# Altium PCB WIZ850io_SCH_V100.PcbDoc
Units mil, origin at the board's own origin, x right, y up, seen from the top; angles counter-clockwise.
Board outline 905.51 x 984.25 mil, 4 copper layers (Top Layer, Internal Plane 1, Internal Plane 2, Bottom Layer); 39 components, 33 nets, 146 pads, 68 vias.
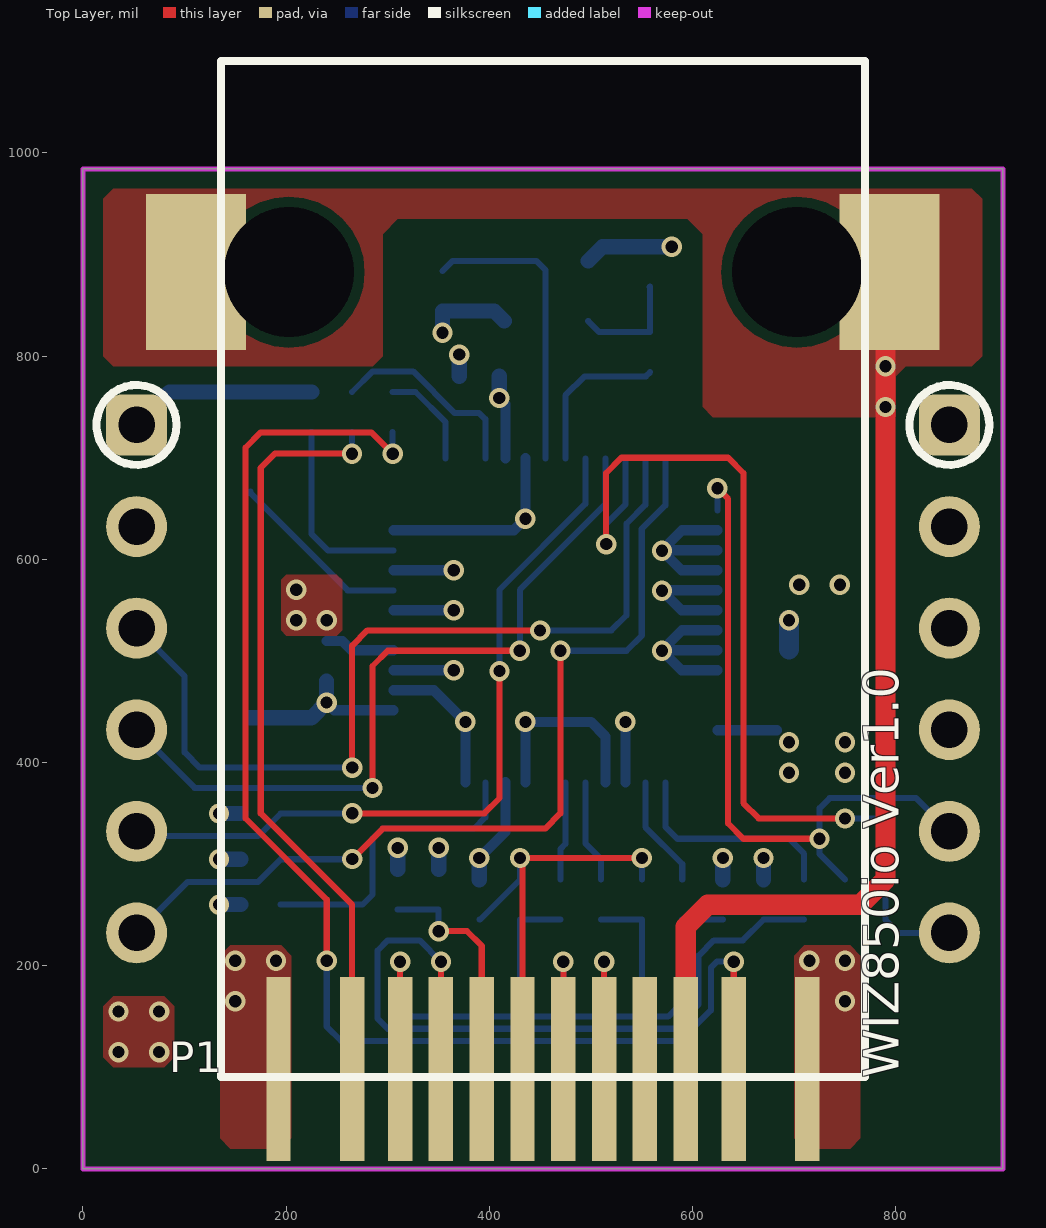
[diagram p0: Top Layer view]
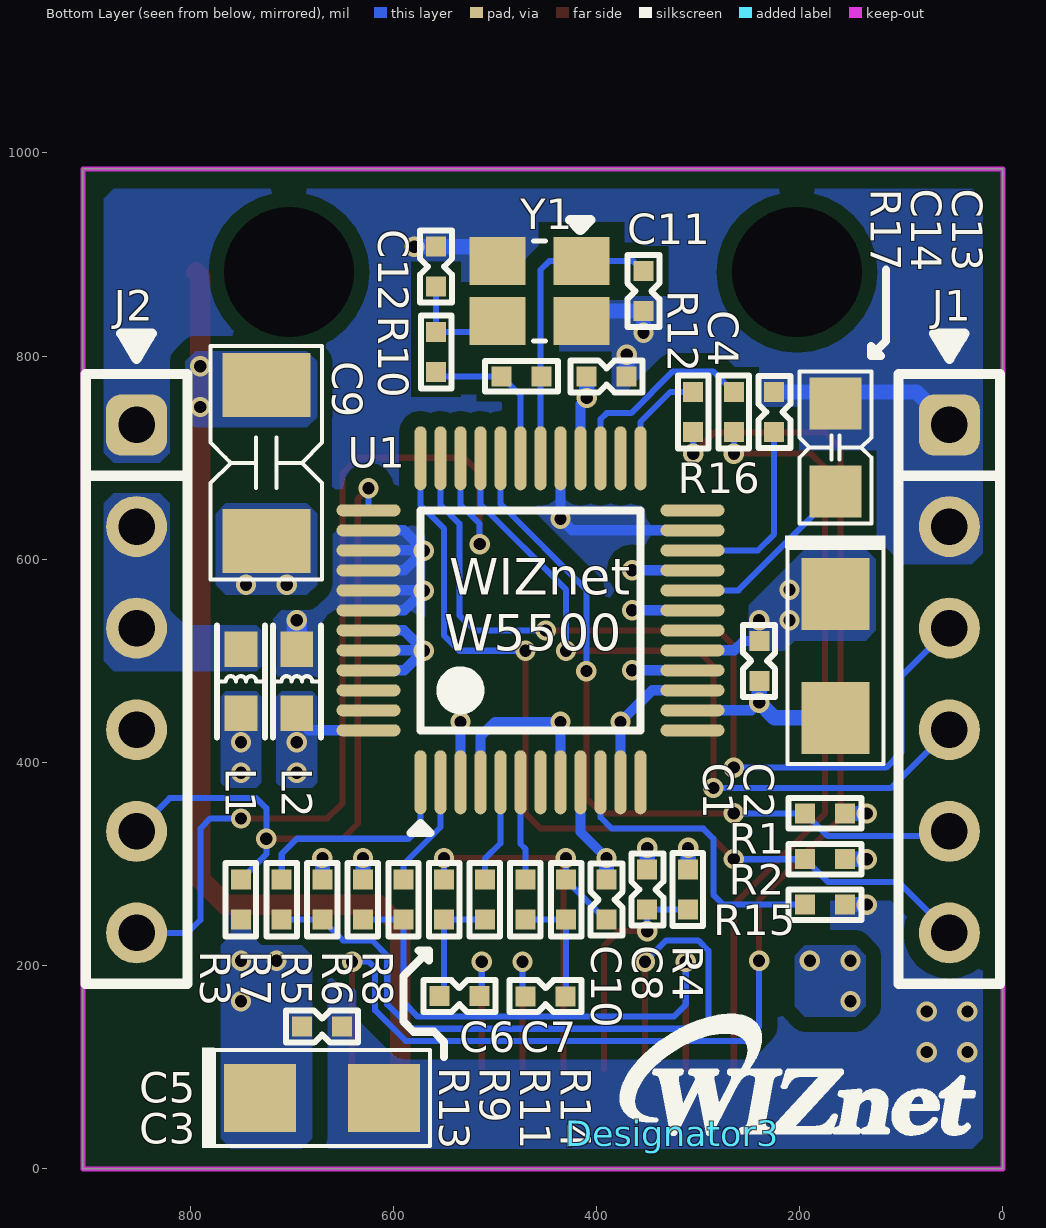
[diagram p1: Bottom Layer view, seen from below]
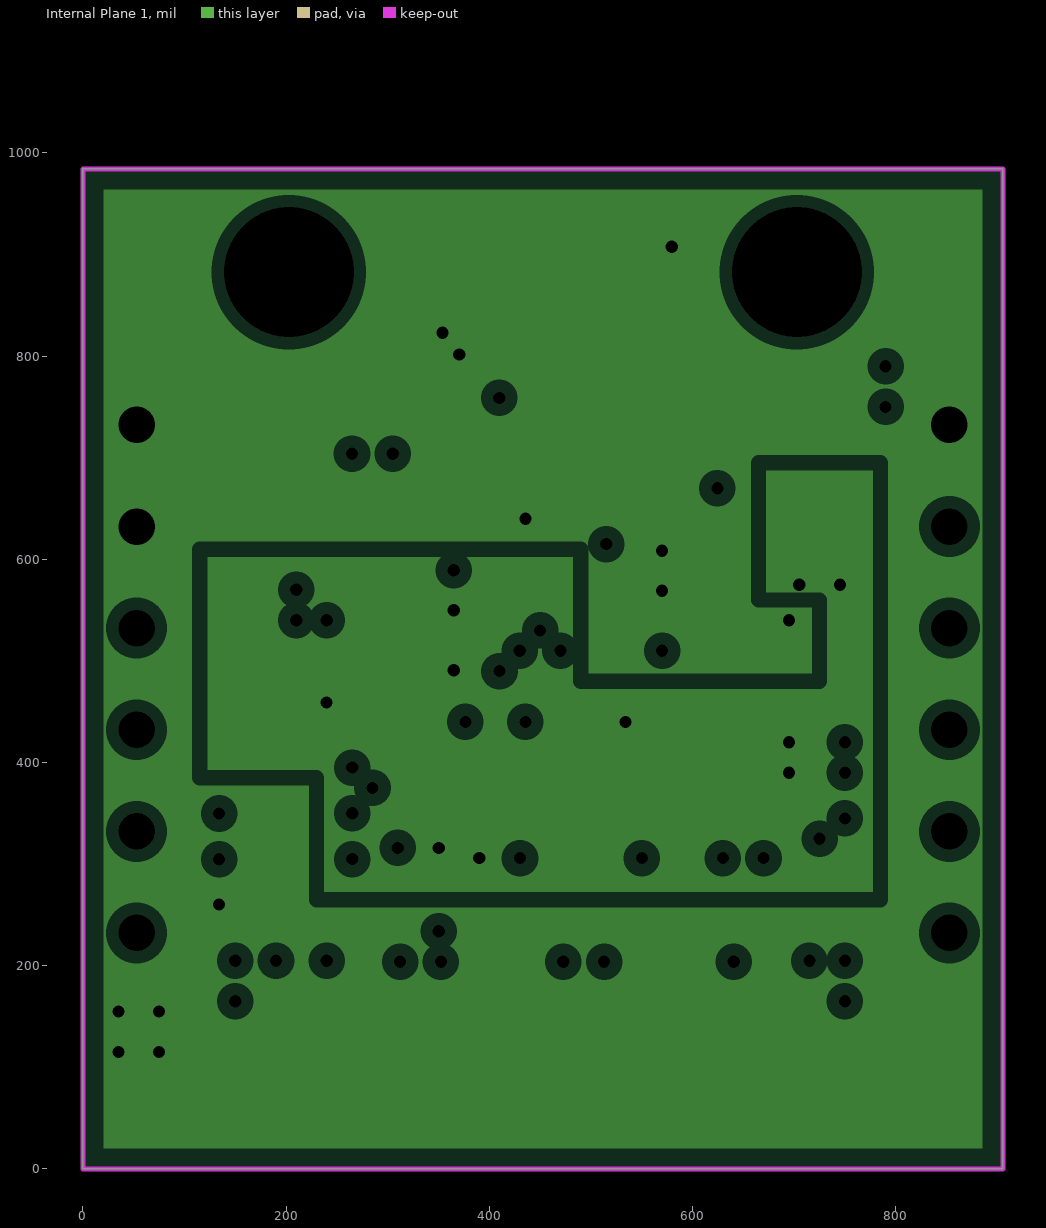
[diagram p2: Internal Plane 1, clearances drawn from the general rule]
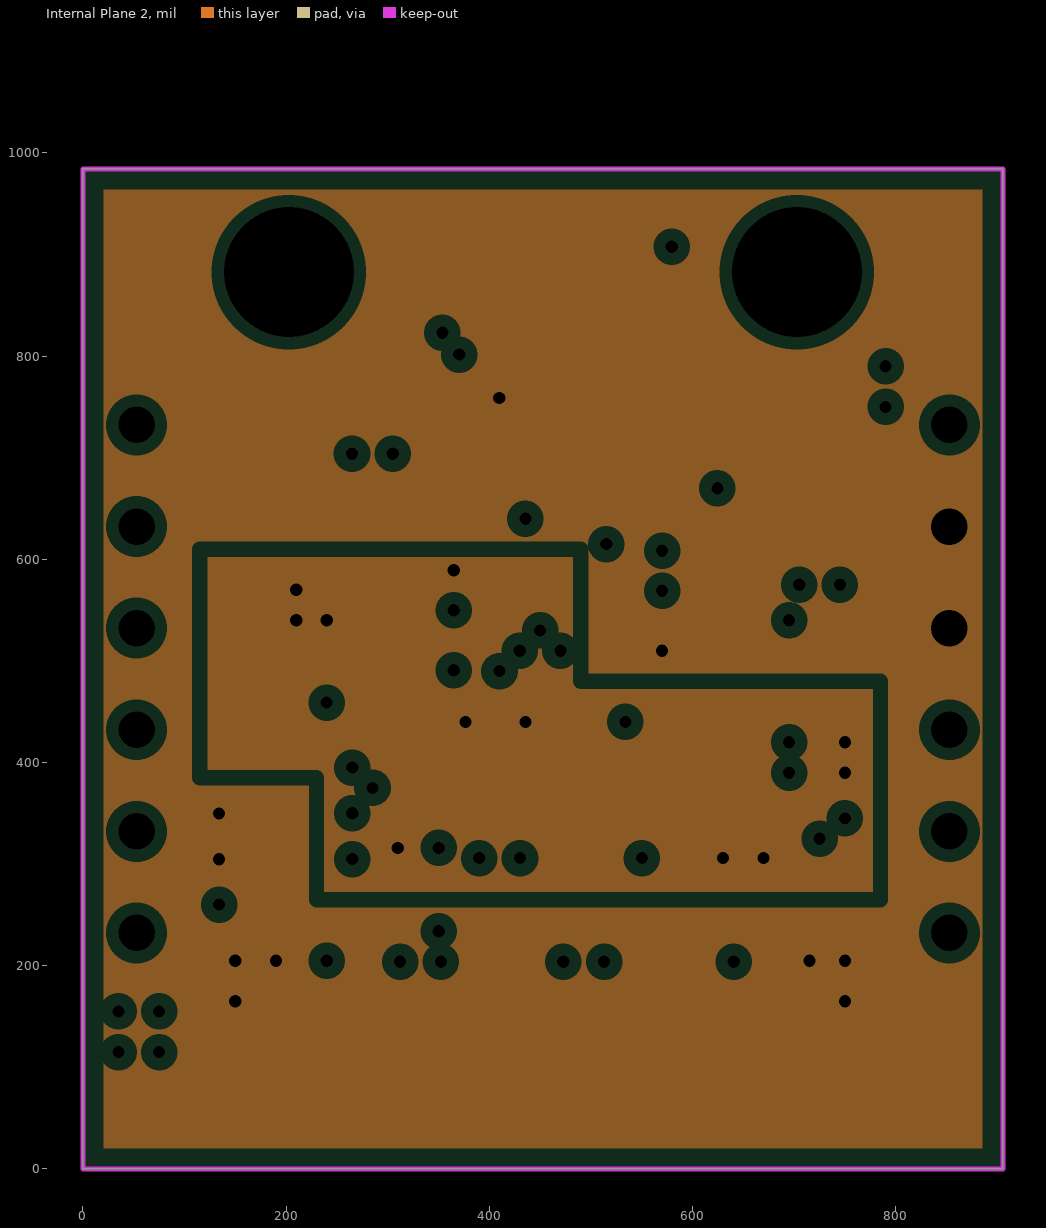
[diagram p3: Internal Plane 2, clearances drawn from the general rule]
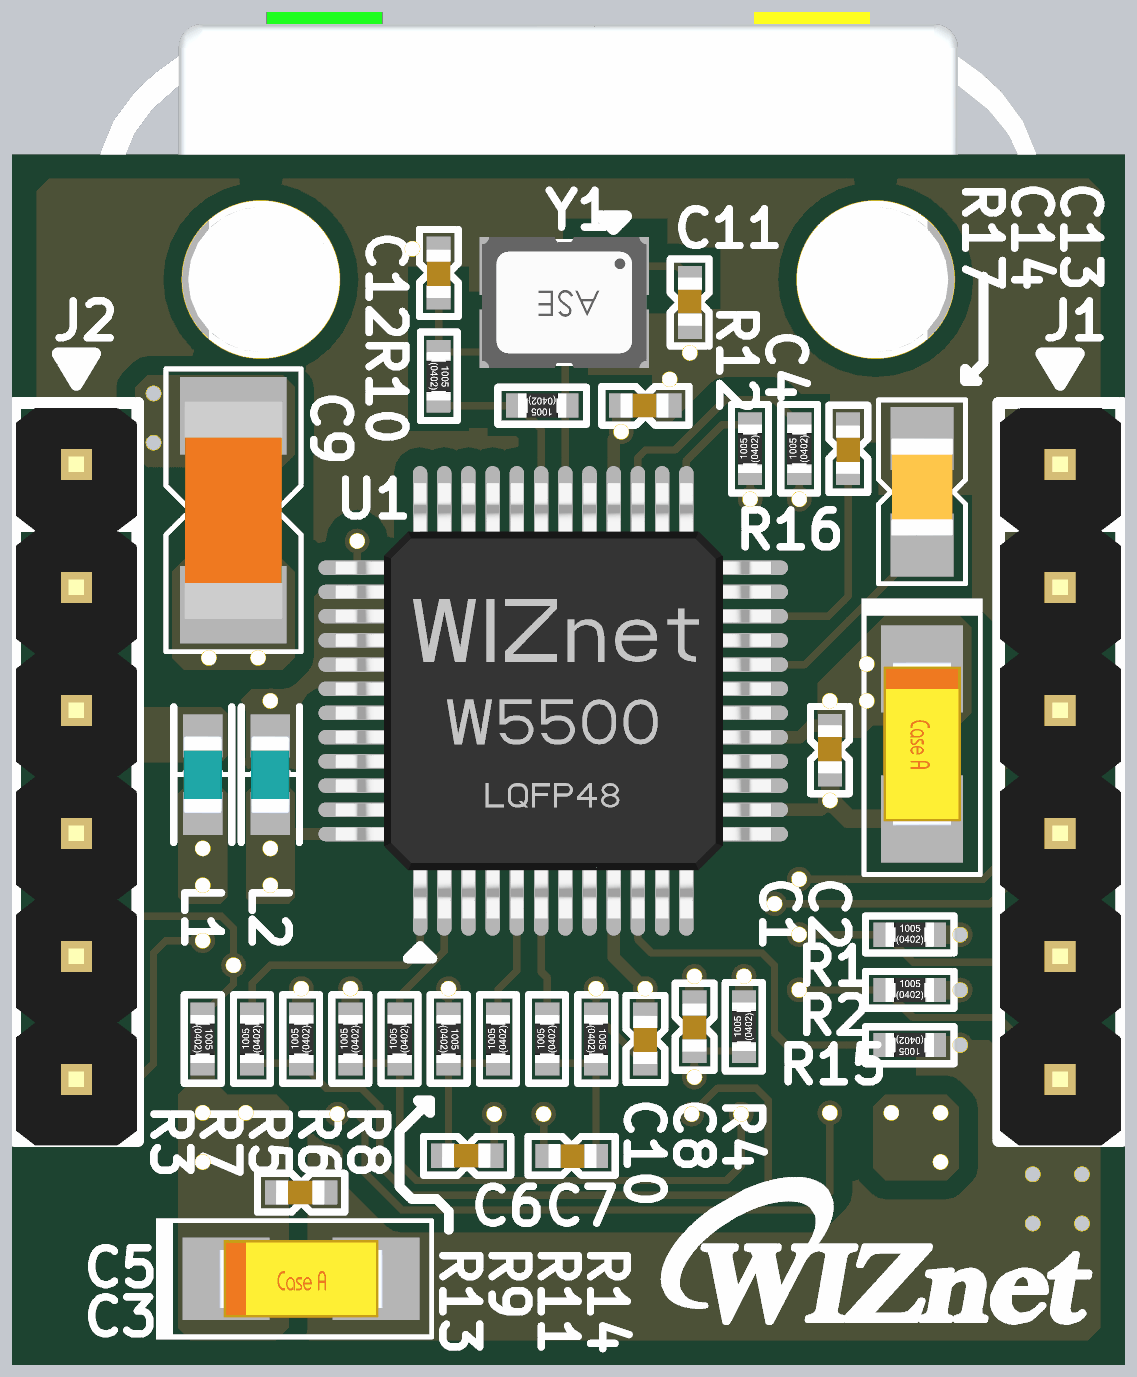
[diagram p4: 3D render of the assembled board from below, using the file's embedded part models]

## Layer stack, top to bottom
Top Solder: solder mask 0.4, Solder Resist, Dk 3.5
Top Layer: signal copper 1.4
Dielectric1: dielectric 12.6, FR-4, Dk 4.8
Internal Plane 1: plane copper 1.4, net GND
Dielectric2: dielectric 12.6, FR-4, Dk 4.8
Internal Plane 2: plane copper 1.4, net 3.3V_D
Dielectric3: dielectric 12.6, FR-4, Dk 4.8
Bottom Layer: signal copper 1.4
Bottom Solder: solder mask 0.4, Solder Resist, Dk 3.5

## Board outline
0,0 905.51,0 905.51,984.25 0,984.25

## Design rules (kind name [scope] priority, off if disabled: settings)
Clearance [All] p1: gap=6
PlaneClearance [All] p1: clearance=12
PlaneConnect [All] p1: planeconnectstyle=Direct reliefexpansion=20 reliefentries=4 reliefconductorwidth=10 reliefairgap=10
PolygonConnect [All] p1: connectstyle=Direct reliefconductorwidth=10 reliefentries=4 polygonreliefangle="90 Angle" airgapwidth=10
RoutingVias [All] p1: holewidth=12 width=20 viastyle="Through Hole" minholewidth=12 minwidth=20 maxholewidth=28 maxwidth=50
SolderMaskExpansion [All] p1: expansion=0
UnpouredPolygon [All] p1: allowunpoured=FALSE
Width [All] p1: maxlimit=100 minlimit=4 preferedwidth=10
27 further rules are at their usual default settings.

## Components (designator, comment, footprint, x,y, rotation, side; value= is the part's Value field where it differs from the comment)
C1 "0.1uF" CAP-0402 240,500 r90 bottom
C2 "10uF/16V" "CAP-A SIZE" 165,505 r270 bottom
C3 "10uF/16V" "CAP-A SIZE" 670,70 r180 bottom
C4 "0.1uF" CAP-0402 390,780 r0 bottom
C5 "0.1uF" CAP-0402 670,140 r0 bottom
C6 "6.8nF" CAP-0402 535,170 r0 bottom
C7 "6.8nF" CAP-0402 450,170 r180 bottom
C8 "22nF" CAP-0402 350,275 r270 bottom
C9 "1nF/2kV" CAP-1808 725,695 r90 bottom
C10 "10nF" CAP-0402 390,265 r270 bottom
C11 "18pF" CAP-0402 354,864 r90 bottom
C12 "18pF" CAP-0402 558,888 r270 bottom
C13 "4.7uF" CAP-0805 165,710 r270 bottom
C14 "10nF" CAP-0402 225,745 r270 bottom
Designator3 "Comment" LOGO-WIZNET(SMALL) 325,35 r180 bottom
J1 "2.54mm 1x6 Pin Header DIP" IDC-1X6 52.76,732.28 r270 bottom locked
J2 "2.54mm 1x6 Pin Header DIP" IDC-1X6 852.76,732.28 r270 bottom locked
L1 "HH-1M1608-121JT" IND-0603 750,480 r90 bottom
L2 "HH-1M1608-121JT" IND-0603 695,480 r90 bottom
P1 "BS-R250210" BS-R250210 452.76,590.55 r180 top locked
R1 "4.7K" RES-0402 175,350 r180 bottom
R2 "4.7K" RES-0402 175,305 r180 bottom
R3 "4.7K" RES-0402 750,265 r270 bottom
R4 "10R" RES-0402 310,275 r90 bottom
R5 "49R9" RES-0402 670,265 r90 bottom
R6 "49R9" RES-0402 630,265 r90 bottom
R7 "33R" RES-0402 710,265 r90 bottom
R8 "33R" RES-0402 590,265 r90 bottom
R9 "33R" RES-0402 510,265 r90 bottom
R10 "0R" RES-0402 558,804 r270 bottom
R11 "33R" RES-0402 470,265 r90 bottom
R12 "1M" RES-0402 474,780 r0 bottom
R13 "49R9" RES-0402 550,265 r270 bottom
R14 "49R9" RES-0402 430,265 r270 bottom
R15 "12.4K" RES-0402 175,260 r0 bottom
R16 "330R" RES-0402 305,745 r90 bottom
R17 "330R" RES-0402 265,745 r90 bottom
U1 "W5500" "WIZNET W5500" 465,540 r180 bottom locked
Y1 "25MHz" OSC-82J0626 456,864 r0 bottom

## Footprints (in the part's own frame and the unit in brackets; to place one, negate y for a bottom-side part, rotate by r counter-clockwise, add the part's x,y. Pads: shape width x height; smd on the part's side, far side on the other; paste and mask are expansions set on the pad)
BS-R250210 [mm] "BS-R250210"
  rect 0.61x4.6 smd: L1(6.61,12.5) L2(4.77,12.5) L3(-4.77,12.5) L4(-6.61,12.5) R1(3.57,12.5) R2(2.55,12.5) R3(1.53,12.5) R4(0.51,12.5) R5(-0.51,12.5) R6(-1.53,12.5) R7(-2.55,12.5) R8(-3.57,12.5)
  rect 2.5x3.9 smd: S1(-8.67,-7.42) S2(8.67,-7.42)
  round 0 hole 3.25: ""(-6.35,-7.42) ""(6.35,-7.42)
  silkscreen extent -8.05,-12.7 8.05,12.7, body extent -9.75,-12.95 9.75,14.1, height 14.58
CAP-0402 [mm] "Ceramic CAP 0402(1005)"
  rect 0.5x0.5 smd: 1(-0.5,-0.004) 2(0.5,-0.004)
  silkscreen extent -0.9,-0.4 0.9,0.4, body extent -0.48,-0.25 0.52,0.25, height 0.6
CAP-0805 [mm] "Ceramic CAP 0805(2012)"
  rect 1.3x1.3 smd: 1(-1.1,0) 2(1.1,0)
  silkscreen extent -1.9,-0.9 1.9,0.9, body extent -1.19,-0.64 0.99,0.64, height 1.26
CAP-1808 [mm] "Ceramic CAP 1808(4520)"
  rect 1.6x2.2 smd: 1(-1.95,0) 2(1.95,0)
  silkscreen extent -2.92,-1.4 2.92,1.4, body extent -2.25,-1.02 2.25,1.01, height 2
"CAP-A SIZE" [mm] "Tantal CAP A Size EIA/IECQ 3216"
  rect 1.8x1.7 smd: 1(-1.55,0) 2(1.55,0)
  silkscreen extent -3,-1.25 2.7,1.25, body extent -1.7,-0.8 1.7,0.8, height 1.75
IDC-1X6 [mil]
  rrect50% 60x60 hole 36: 1(0,0)
  round 60 hole 36: 2(100,0) 3(200,0) 4(300,0) 5(400,0) 6(500,0)
  silkscreen extent -90,-50 550,50, body extent -46,-49 554,49, height 323
IND-0603 [mm] "Inductor 0603(1608)"
  rect 0.89x0.82 smd: 1(-0.8,0) 2(0.8,0)
  silkscreen extent -1.4,-0.6 1.4,0.6, body extent -0.8,-0.4 0.8,0.4, height 0.95
LOGO-WIZNET(SMALL) [mil]
  silkscreen extent -50,0 296,115
OSC-82J0626 [mm]
  rect 1.4x1.2 smd: 1(-1.05,-0.75) 2(1.05,-0.75) 3(1.05,0.75) 4(-1.05,0.75)
  silkscreen extent -1.27,-1.78 0.15,1.25, body extent -1.7,-1.35 1.7,1.35, height 1.06
RES-0402 [mm]
  rect 0.5x0.5 smd: 1(-0.5,-0.004) 2(0.5,-0.004)
  silkscreen extent -0.91,-0.38 0.91,0.38, body extent -0.5,-0.25 0.5,0.25, height 0.35
"WIZNET W5500" [mm]
  oval 0.3x1.6 smd: 1(-2.75,-4.05) 2(-2.25,-4.05) 3(-1.75,-4.05) 4(-1.25,-4.05) 5(-0.75,-4.05) 6(-0.25,-4.05) 7(0.25,-4.05) 8(0.75,-4.05) 9(1.25,-4.05) 10(1.75,-4.05) 11(2.25,-4.05) 12(2.75,-4.05) 25(2.75,4.05) 26(2.25,4.05) 27(1.75,4.05) 28(1.25,4.05) 29(0.75,4.05) 30(0.25,4.05) 31(-0.25,4.05) 32(-0.75,4.05) 33(-1.25,4.05) 34(-1.75,4.05) 35(-2.25,4.05) 36(-2.75,4.05)
  oval 1.6x0.3 smd: 13(4.05,-2.75) 14(4.05,-2.25) 15(4.05,-1.75) 16(4.05,-1.25) 17(4.05,-0.75) 18(4.05,-0.25) 19(4.05,0.25) 20(4.05,0.75) 21(4.05,1.25) 22(4.05,1.75) 23(4.05,2.25) 24(4.05,2.75) 37(-4.05,2.75) 38(-4.05,2.25) 39(-4.05,1.75) 40(-4.05,1.25) 41(-4.05,0.75) 42(-4.05,0.25) 43(-4.05,-0.25) 44(-4.05,-0.75) 45(-4.05,-1.25) 46(-4.05,-1.75) 47(-4.05,-2.25) 48(-4.05,-2.75)
  silkscreen extent -3,-5.32 2.75,2.75, body extent -4.5,-4.5 4.5,4.5, height 1.65

## Part data
C1 C4 C5 C6 C7 C8 C10 C11 C12 C13: library part CAP-0402, "Ceramic CAP 0402(1005)"
C2 C3: library part "CAP-A Size", "Tantla CAP A Size EIA/IECQ 3216"
C9: library part CAP-1808, "Ceramic CAP 1808(4520)"
C14: library part CAP-0805, "Ceramic CAP 0805(2012)"
L1 L2: library part IND-0603, "Inductor 0603(1608)"
R1 R2 R3 R4 R5 R6 R7 R8 R9 R10 R11 R12 R13 R14 R15 R16 R17: library part RES-0402, "RES-0402"
U1: "WIZnet W5500"
Y1: library part OSC-82J0626-25MHz, "X-tal 25MHz,3.2x2.5 SMD, CL=18pF"

## Via types
v1: diameter 20, hole 12, Top Layer to Bottom Layer, tented both sides, 68 vias

## Nets (pads, with @x,y where several pads share a name; then routed paths per layer and width w, separated by ;. In a path a pad name is that pad's centre, name@x,y a point inside that pad or via, vN(x,y) a via of type N, cw(c..) or ccw(c..) an arc to the next point about the centre after c; other vN are vias at no path point)
3.3V_A: C1.2 C2.1 L1.1 R4.2 R5.2 R6.2 U1.4 U1.8 U1.11 U1.15 U1.17 U1.21 | length 525.4
  Bottom Layer w10: C1.2 255.32,519.68 264.53,510.47 U1.17 ; U1.15 345.31,471.1 v1(376.42,440) U1.11 ; U1.21 v1(365,589.21) ; U1.8 v1(435.47,440) 500,440 514.21,425.79 U1.4
  Bottom Layer w15: R4.2 v1(309.84,316) ; R6.2 v1(629.84,306) ; R5.2 v1(669.84,306)
  other v1: 750,390 750,420 210,540 240,540 210,570
3.3V_D: C3.1 C4.2 C5.2 J2.2 J2.3 L1.2 P1.L1 P1.L4 R1.2 R2.2 R3.2 U1.28 U1.43 U1.44 U1.45 | length 305.3
  Bottom Layer w10: v1(409.68,758.84) 415.79,752.74 U1.28 ; v1(570,510) 589.21,490.79 U1.45 ; U1.44 570,510.47 589.68,530.16 U1.43
  Bottom Layer w15: v1(134,304.84) R2.2 ; v1(134,349.84) R1.2 ; v1(409.68,758.84) C4.2
  other v1: 150,165 750,165 150,205 190,205 715,205 750,205
ACT_LED: R17.2 U1.27 | length 197.6
  Bottom Layer w6: R17.2 285.16,785 325,785 366,744 390,744 396.1,737.9 U1.27
AGND: C1.1 C2.2 C8.1 C9.1 C10.1 L2.1 U1.3 U1.9 U1.14 U1.16 U1.19 U1.48 | length 536.2
  Bottom Layer w10: v1(239.84,459) 247.43,451.42 U1.14 ; U1.16 v1(365,490.79) ; U1.19 v1(365,549.84) ; v1(390.16,306) 415.79,331.63 U1.9 ; U1.3 v1(533.9,440) ; U1.48 L2.1@683.27,431.73
  Bottom Layer w15: C2.2 224.82,443.98 v1(239.84,459) C1.1 ; C8.1 v1(350.16,316) ; C10.1 v1(390.16,306)
  other v1: 695,390 695,420 705,575 745,575
GND: C3.2 C4.1 C5.1 C11.1 C12.1 C13.1 C14.1 J1.1 J1.2 J2.1 L2.2 R15.1 U1.23 U1.29 U1.38 U1.39 U1.40 U1.41 U1.42 Y1.2 Y1.4 | length 923
  Bottom Layer w10: U1.23 424.06,628.58 v1(435.47,640) U1.29 ; v1(570,569.06) 589.21,549.84 U1.42 ; v1@570,569.53 U1.41 ; v1(570,608.43) 589.21,589.21 U1.40 ; U1.39 570,608.9 589.68,628.58 U1.38 ; L2.2@693.98,510.47 L2.2
  Bottom Layer w15: J1.1 85.16,764.68 C14.1 ; v1(134,260.16) R15.1 ; v1(353.84,823) C11.1 404.82,844.32 Y1.4 ; C4.1 v1(370.32,801.47) ; Y1.2 511.5,907.68 C12.1 v1(579.47,907.68)
  Bottom Layer w20: L2.2 v1(695,540)
  other v1: 35,115 75,115 35,155 75,155
INTN: J1.6 R2.1 U1.36 | length 896.3
  Top Layer w6: v1(265,305) 295,335 455,335 470,350 v1(470,510)
  Bottom Layer w6: J1.6 102.97,282.5 172.34,282.5 R2.1 264.84,304.84 v1(265,305) ; v1(470,510) 535,510 550,525 550,630 573.27,653.27 U1.36
LINK_LED: R16.2 U1.25 | length 99.9
  Bottom Layer w6: R16.2 327.32,764.68 356.73,735.27 U1.25
MISO: J2.6 U1.34 | length 943.1
  Top Layer w6: v1(515,615) 515,685 530,700 635,700 650,685 650,360 665,345 v1(750,345)
  Bottom Layer w6: v1(515,615) 515,635 533.9,653.9 U1.34 ; v1(750,345) 780,345 790,335 790,245 802.72,232.28 J2.6
MOSI: J1.3 U1.35 | length 877.6
  Top Layer w6: v1(265,395) 265,515 280,530 v1(450,530)
  Bottom Layer w6: J1.3 100,485.04 100,410 115,395 v1(265,395) ; v1(450,530) 520,530 535,545 535,635 553.58,653.58 U1.35
NetC6_1: C6.1 P1.R6 | length 140.4
  Top Layer w6: P1.R6 v1(512.99,204)
  Bottom Layer w6: v1(512.99,204) 512.99,172.48 C6.1
NetC6_2: C6.2 R9.1 R13.2 | length 117.3
  Bottom Layer w6: R9.1 R13.2 550.16,174.68 C6.2
NetC7_1: C7.1 P1.R5 | length 141
  Top Layer w6: P1.R5 v1(472.83,204)
  Bottom Layer w6: C7.1 472.83,172.99 v1(472.83,204)
NetC7_2: C7.2 R11.1 R14.2 | length 115.2
  Bottom Layer w6: C7.2 430.16,170 R14.2 R11.1
NetC8_2: C8.2 P1.R3 R4.1 | length 231.1
  Top Layer w6: v1(350.16,234) 378,234 392.52,219.48 P1.R3
  Bottom Layer w6: R4.1 C8.2 v1(350.16,234)
NetC9_2: C9.2 P1.R8 P1.S1 P1.S2 | length 955.3
  Top Layer w20: P1.R8 593.31,238.31 615,260 765,260 790,285 790,878.58 P1.S1
  other v1: 790,750 790,790
NetC10_2: C10.2 P1.R4 R13.1 R14.1 | length 427.6
  Top Layer w6: P1.R4 432.68,303.48 v1(430.16,306) v1(550.16,306)
  Bottom Layer w6: C10.2 390.79,245.32 R14.1 v1(430.16,306) ; R13.1 v1(550.16,306)
NetC12_2: C12.2 R10.1 Y1.3 | length 110.4
  Bottom Layer w6: Y1.3 508.13,823.68 R10.1 C12.2 C12.2@557.84,868
NetC13_2: C13.2 U1.20 | length 181.8
  Bottom Layer w6: C13.2 165,665 260.47,569.53 U1.20
NetC14_2: C14.2 U1.22 | length 187.5
  Bottom Layer w6: C14.2 225.16,624.84 241.1,608.9 U1.22
NetP1_L2: P1.L2 R17.1 | length 745.8
  Top Layer w6: v1(264.84,704) 189,704 175,690 175,350 264.96,260.04 P1.L2
  Bottom Layer w6: v1(264.84,704) R17.1
NetP1_L3: P1.L3 R16.1 | length 1353
  Top Layer w6: v1(240,205) 240,265 160,345 160,710 175,725 283.84,725 v1(304.84,704) ; P1.L3 v1(640.55,204)
  Bottom Layer w6: v1(240,205) 240,140 254,126 588,126 618,156 618,198 624,204 v1(640.55,204) ; v1(304.84,704) R16.1
NetP1_R1: P1.R1 R6.1 R8.1 | length 557.5
  Top Layer w6: P1.R1 v1(312.2,204)
  Bottom Layer w6: v1(312.2,204) 312.2,161.8 324,150 576,150 589.84,163.84 R8.1 R6.1
NetP1_R2: P1.R2 R5.1 R7.1 | length 744.3
  Top Layer w6: P1.R2 v1(352.36,204)
  Bottom Layer w6: v1(352.36,204) 331.36,225 300,225 290,215 290,148 300,138 582,138 606,162 606,210 621,225 649.53,225 R5.1 R7.1
NetR7_2: R7.2 U1.1 | length 216.9
  Bottom Layer w6: U1.1 573.27,336.73 585,325 695,325 709.84,310.16 R7.2
NetR8_2: R8.2 U1.2 | length 110.9
  Bottom Layer w6: U1.2 553.58,336.42 589.84,300.16 R8.2
NetR9_2: R9.2 U1.5 | length 102.2
  Bottom Layer w6: U1.5 494.53,320.47 509.84,305.16 R9.2
NetR11_2: R11.2 U1.6 | length 97.9
  Bottom Layer w6: R11.2 469.84,314.84 474.84,319.84 U1.6
NetR15_2: R15.2 U1.10 | length 303.7
  Bottom Layer w6: R15.2 275.16,260.16 285,270 285,325 295,335 385,335 396.1,346.1 U1.10
RSTN: J2.5 R3.1 U1.37 | length 678.5
  Top Layer w6: v1(624.45,670) 635,659.45 635,340 650,325 v1(725,325)
  Bottom Layer w6: U1.37 v1(624.45,670) ; R3.1 725,309.84 v1(725,325) 725,355 735,365 820.04,365 J2.5
SCLK: J1.4 U1.33 | length 751.5
  Top Layer w6: v1(285,375) 285,495 300,510 v1(430,510)
  Bottom Layer w6: J1.4 110.04,375 v1(285,375) ; v1(430,510) 430,570 514.21,654.21 U1.33
SCSN: J1.5 R1.1 U1.32 | length 744.2
  Top Layer w6: v1(265,350) 395,350 410,365 v1(410,490)
  Bottom Layer w6: J1.5 57.54,327.5 172.34,327.5 R1.1 264.84,349.84 v1(265,350) ; v1(410,490) 410,570 494.53,654.53 U1.32
XI: C11.2 R12.1 U1.30 Y1.1 | length 294.4
  Bottom Layer w6: C11.2 363.69,893.53 Y1.1 446.47,893.53 455.16,884.84 U1.30
XO: R10.2 R12.2 U1.31 | length 154.7
  Bottom Layer w6: U1.31 474.84,761.32 R12.2 554,780.16 R10.2
pads on no net: J2.4 P1. P1.R7 U1.7 U1.12 U1.13 U1.18 U1.24 U1.26 U1.46 U1.47

## Polygon pours and split planes (outlines as drawn)
GND on Top Layer "Top Layer-NET" (solid, remove dead copper, pour order 25): 30,170 20,160 20,110 30,100 80,100 90,110 90,160 80,170
3.3V_A on Top Layer "Top Layer-NET" (solid, remove dead copper, pour order 12): 205,585 200,585 195,580 195,530 200,525 250,525 255,530 255,580 250,585
NetC9_2 on Top Layer "Top Layer-NET" (solid, remove dead copper, pour order 10): 800,740 620,740 610,750 610,770 610,920 595,935 540,935 310,935 295,920 295,900 295,800 285,790 265,790 30,790 20,800 20,845 20,955 30,965 75,965 875,965 885,955 885,940 885,800 875,790 855,790 810,790 800,780
3.3V_D on Top Layer "Keep-Out Layer-No Net" (solid, remove dead copper, pour order 7): 145,220 135,210 135,30 145,20 195,20 205,30 205,210 195,220
3.3V_D on Top Layer "Keep-Out Layer-No Net" (solid, remove dead copper, pour order 13): 710,220 700,210 700,30 710,20 755,20 765,30 765,210 755,220
3.3V_D on Bottom Layer "Top Layer-NET" (solid, remove dead copper, pour order 22): 145,220 135,210 135,160 145,150 195,150 205,160 205,210 195,220
NetC9_2 on Bottom Layer "Top Layer-NET" (solid, remove dead copper, pour order 16): 805,745 805,740 795,730 685,730 675,740 675,795 685,805 795,805 805,795
3.3V_A on Bottom Layer "Keep-Out Layer-No Net" (solid, remove dead copper, pour order 9): 250,510 215,510 205,520 190,520 135,520 125,530 125,600 135,610 195,610 245,560 250,555 250,510
3.3V_D on Bottom Layer "Keep-Out Layer-No Net" (solid, remove dead copper, pour order 11): 740,20 690,20 680,30 680,40 680,210 690,220 730,220 740,230 740,255 760,255 760,230 770,220 770,90 770,30 760,20
3.3V_D on Bottom Layer "Keep-Out Layer-No Net" (solid, remove dead copper, pour order 15): 730,495 735,490 775,490 875,490 885,500 885,555 885,655 875,665 855,665 830,665 820,655 820,645 820,550 805,535 735,535 730,530
AGND on Bottom Layer "Keep-Out Layer-No Net" (solid, remove dead copper, pour order 17): 685,655 675,645 675,575 685,565 765,565 775,575 775,645 765,655
AGND on Bottom Layer "Keep-Out Layer-No Net" (solid, remove dead copper, pour order 19): 680,470 675,465 675,380 680,375 710,375 715,380 715,465 710,470
3.3V_A on Bottom Layer "Keep-Out Layer-No Net" (solid, remove dead copper, pour order 21): 735,470 730,465 730,380 735,375 765,375 770,380 770,465 765,470
GND on Bottom Layer "Top Layer-NET" (solid, remove dead copper, pour order 20): 30,965 20,955 20,30 30,20 875,20 885,30 885,60 885,955 875,965
AGND on Internal Plane 1 (split plane): 777.44,272.56 237.56,272.56 237.56,385 237.31,386.96 236.55,388.78 235.35,390.35 233.78,391.55 231.96,392.31 230,392.56 122.56,392.56 122.56,602.44 482.44,602.44 482.44,480 482.69,478.04 483.45,476.22 484.65,474.65 486.22,473.45 488.04,472.69 490,472.44 725,472.44 726.96,472.69 728.78,473.45 730.35,474.65 731.55,476.22 732.31,478.04 732.56,480 732.56,560 732.31,561.96 731.55,563.78 730.35,565.35 728.78,566.55 726.96,567.31 725,567.56 672.56,567.56 672.56,687.44 777.44,687.44
GND on Internal Plane 1 (split plane): 885.42,20.1 20.1,20.1 20.1,964.16 885.42,964.16
3.3V_A on Internal Plane 2 (split plane): 482.44,480 482.69,478.04 483.45,476.22 484.65,474.65 486.22,473.45 488.04,472.69 490,472.44 777.44,472.44 777.44,272.56 237.56,272.56 237.56,385 237.31,386.96 236.55,388.78 235.35,390.35 233.78,391.55 231.96,392.31 230,392.56 122.56,392.56 122.56,602.44 482.44,602.44
3.3V_D on Internal Plane 2 (split plane): 885.42,20.1 20.1,20.1 20.1,964.16 885.42,964.16

## Keep-outs
Keep-Out Layer:
  the board outline again, w5
  text ".Layer_Name" at 370,1170 h60

## Other copper
Top Layer:
  text ".Layer_Name" at 370,1170 h60
Bottom Layer:
  pour cut-out: 820,705 830,695 875,695 885,705 890,705 890,670 820,670
  pour cut-out: 124.41,620.96 98.45,595 30.85,595 20,605.85 19.15,605 15,605 15,490 125,490
  pour cut-out: 820,775 820,550 805,535 775,535 775,775
  pour cut-out: 135,560 125,550 125,405 135,395 240,395 250,385 250,285 260,275 765,275 775,285 775,795 765,805 670,805 660,795 660,665 675,650 675,559.71 685,549.71 709.71,549.71 710,550 725,535 725,480 715,470 490,470 480,480 480,550 470,560
  text ".Layer_Name" at 370,1170 h60
Internal Plane 1 (plane layer: these items are gaps in the copper):
  lines w15: 115,385 230,385 230,265 785,265 785,695 665,695 665,560 725,560 725,480 490,480 490,610 265,610 115,610 115,385
  text ".Layer_Name" at 370,1170 h60
  text "AGND" at 345,365 h30
Internal Plane 2 (plane layer: these items are gaps in the copper):
  lines w15: 115,385 230,385 230,265 785,265 785,480 490,480 490,610 115,610 115,385
  text ".Layer_Name" at 370,1170 h60
  text "3.3V_A" at 330,365 h30
  text "3.3V_D" at 665,105 h30

## Silkscreen, mask and mechanical layers (free items; w line width, h text height)
Top Overlay:
  text ".Layer_Name" at 370,1170 h60
  text "Ver1.0" at 815,335 h60 r90
  text "WIZ850io" at 815,90 h60 r90
Bottom Overlay:
  lines w8: 115,885 115,815 130,800 ; 550,110 550,125 560,135 580,135 590,145 590,190 565,215 ; 130,800 130,810 120,800 130,800 ; 565,215 575,215 565,205 565,215
  text ".Layer_Name" at 370,1170 h60
Top Paste:
  text ".Layer_Name" at 370,1170 h60
Bottom Paste:
  text ".Layer_Name" at 370,1170 h60
Top Solder:
  text ".Layer_Name" at 370,1170 h60
Bottom Solder:
  text ".Layer_Name" at 370,1170 h60
Drill Guide:
  text ".Layer_Name" at 370,1170 h60
Mechanical 2:
  lines w5: 1145,640 2175,640 ; 1145,750 2175,750 ; 0,0 905.51,0 905.51,984.25 0,984.25 0,0 ; 1092,193 ccw(c1120,193) 1120,165 2190,165 ccw(c2190,193) 2218,193 2218,950 ccw(c2190,950) 2190,978 1120,978 ccw(c1120,950) 1092,950 1092,193
  text "BOARD NAME : WIZ850io" at 0,1615 h60
  text "VERSION : V1.0" at 0,1505 h60
  text "SIZE : 23mmX25mmX1.6T" at 0,1395 h60
  text "GERBER DATE : 2015.10.07" at 0,1275 h60
  text "LAYER :" at 0,1170 h60
  text "Layer Stack Up Detail for:" at 1150,895 h40
  text "WIZ850io V1.0.PcbDoc" at 1145,800 h50
  text "Layer Name : 4L  1.6T" at 1150,675 h40
  text "Top Layer" at 1145,530 h60
  text "GND" at 1145,420 h60
  text "POWER" at 1145,315 h60
  text "Bottom Layer" at 1145,215 h60
  text "KS-TECH artwork" at 1090,0 h200
Drill Drawing:
  text ".Layer_Name" at 370,1170 h60

## Dimensions
769.68,1090.55 to 905.51,984.25 on Mechanical 3
52.76,732.28 to 852.76,732.28 on Mechanical 3
135.83,1110.24 to 769.68,1110.24 on Mechanical 3
905.51,984.25 to 852.76,732.28 on Mechanical 3
852.76,232.28 to 905.51,0 on Mechanical 3
905.51,0 to 905.51,984.25 on Mechanical 3
0,0 to 905.51,0 on Mechanical 3

## Text inside footprints (layer, text, board x,y; h text height)
U1: Bottom Overlay "WIZnet" at 545,565 h36